# EAGLE board makey_makey-panel (EAGLE 6.2)
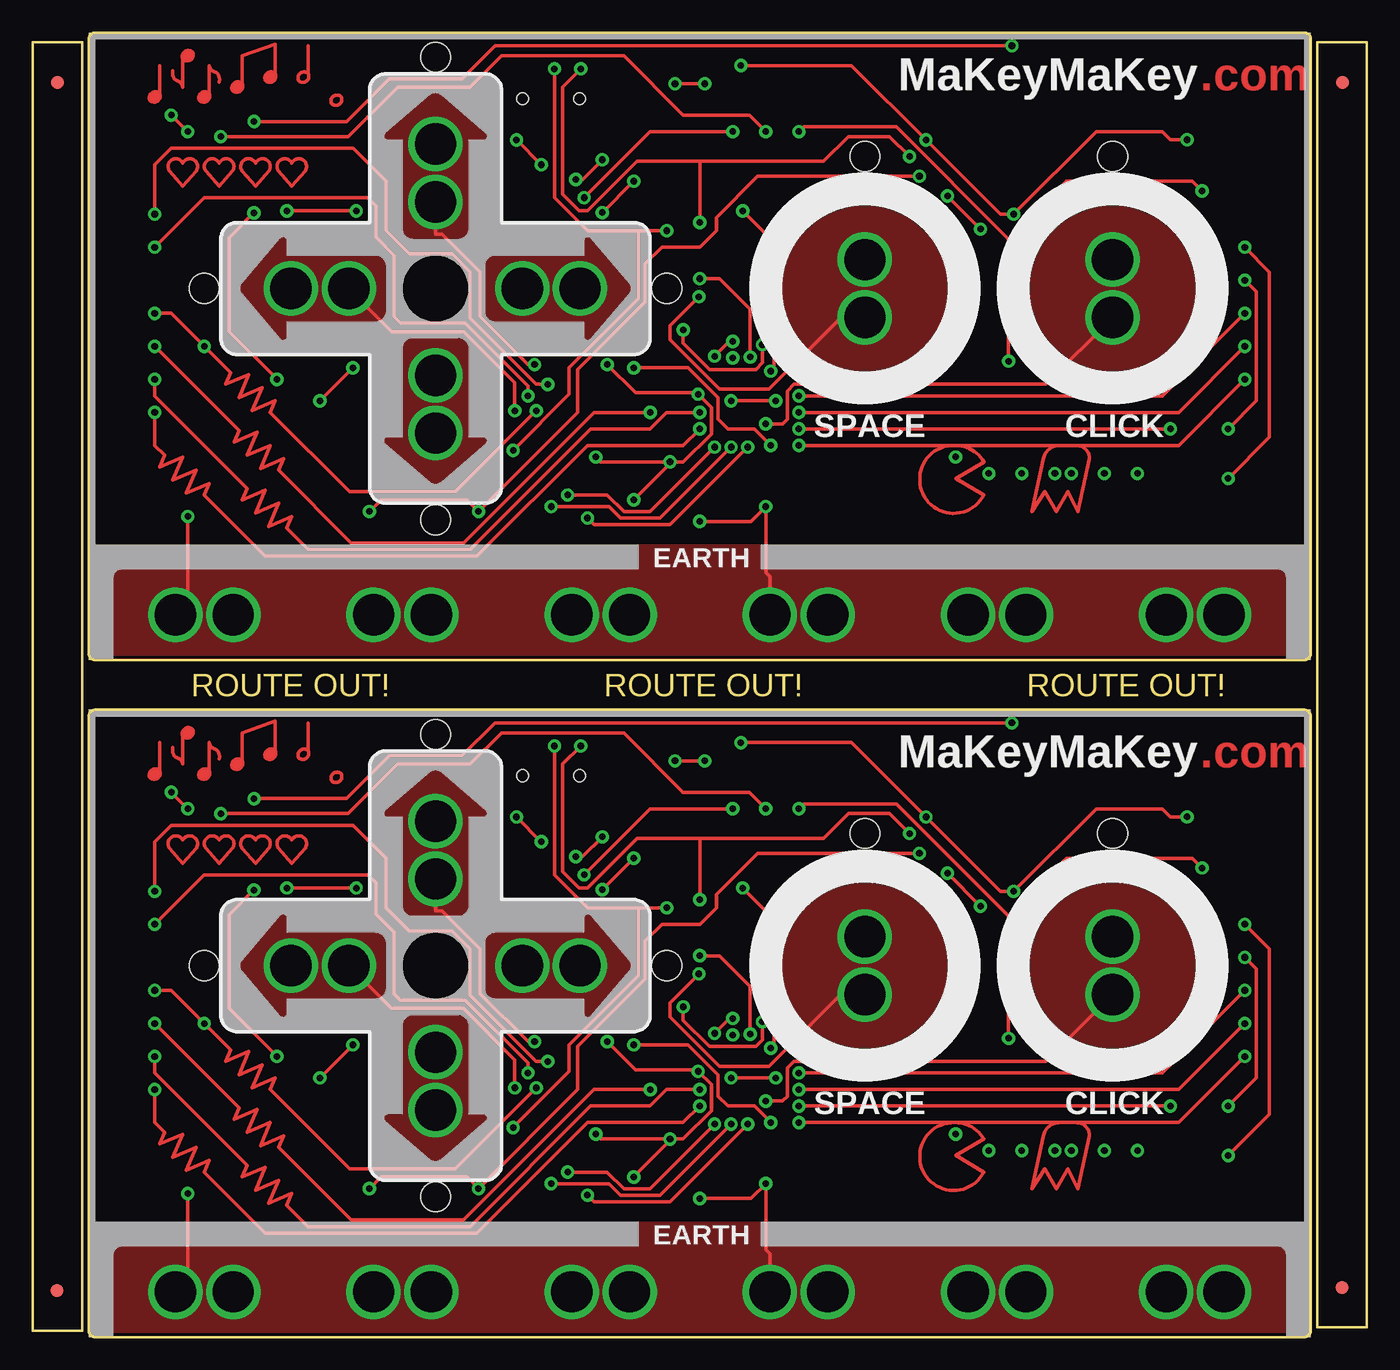
[diagram p0: board, top side]
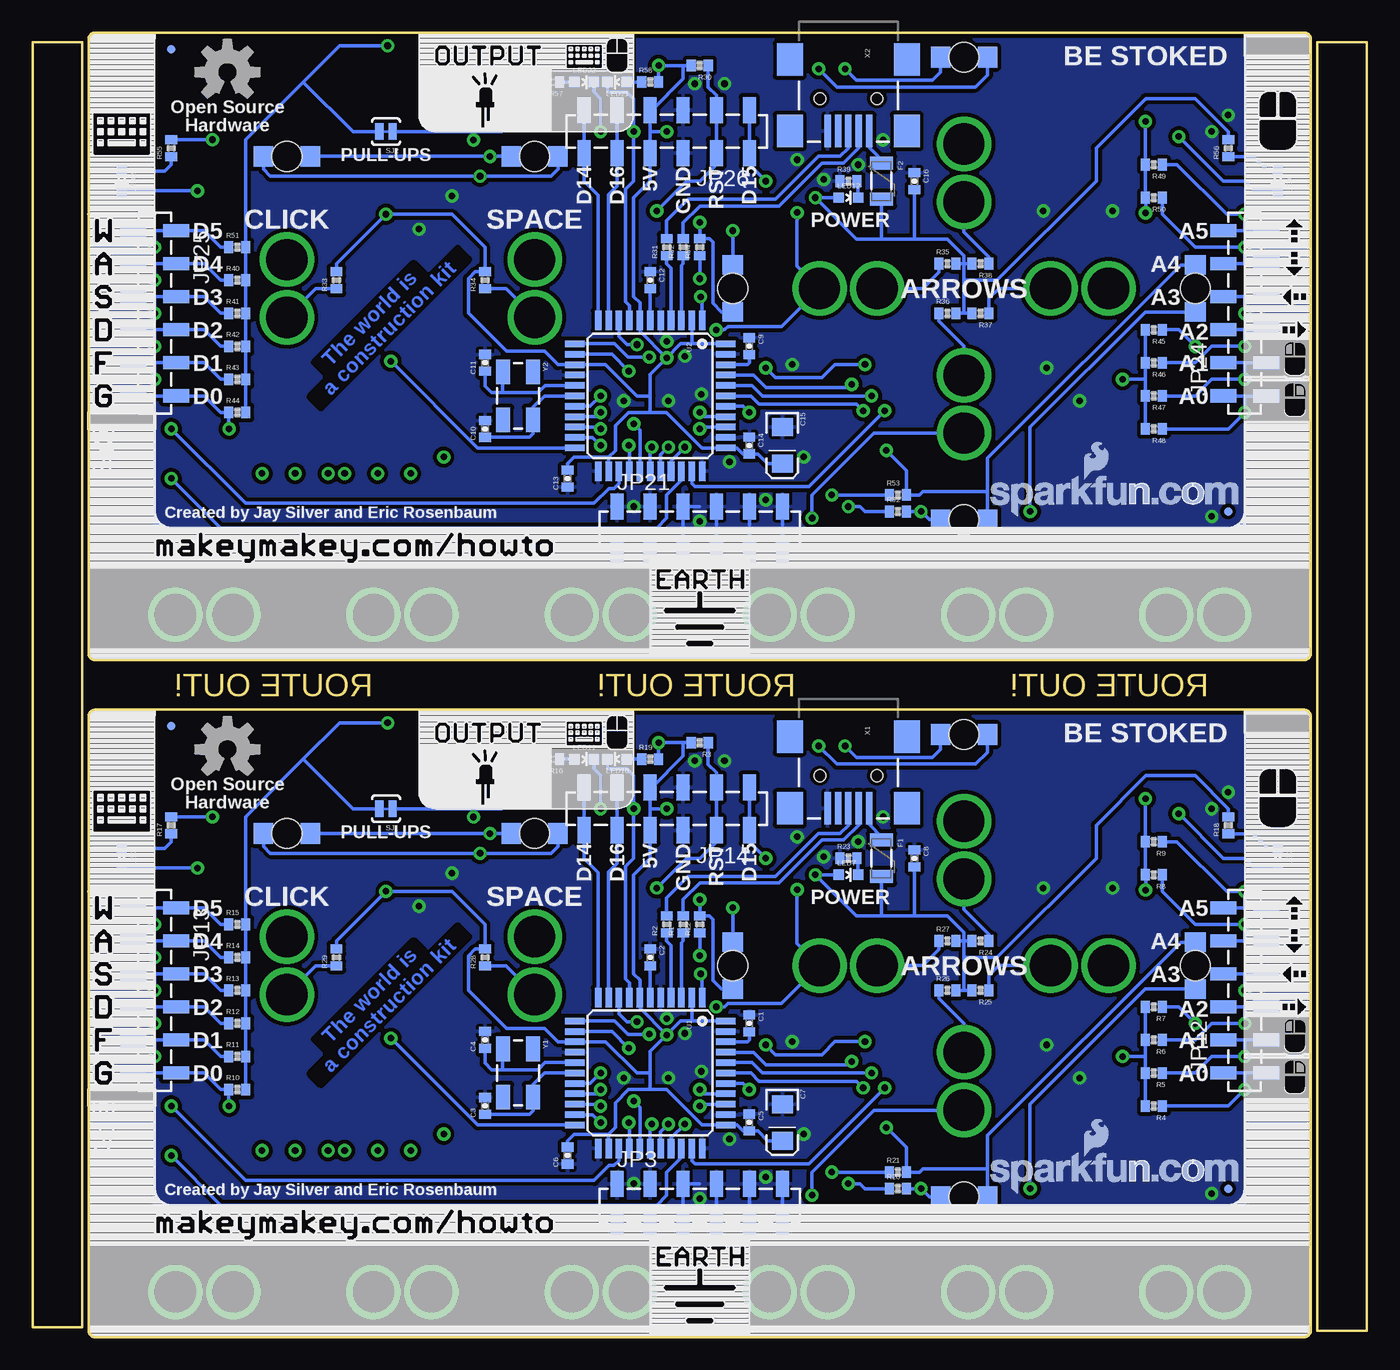
[diagram p1: board, bottom side, seen from below]

Size 102.62 x 100.33 mm. Coordinates in mm from the lower left corner, seen from the top.
Outline: 3.81,3.05 3.81,22.1
Outline: 3.81,22.1 3.81,89.41
Outline: 3.81,22.1 3.81,0.51 0,0.51 0,23.37
Outline: 0,97.03 0,77.98
Outline: 0,77.98 0,10.67
Outline: 0,77.98 0,99.57 3.81,99.57 3.81,76.71
Outline: 98.81,97.03 98.81,77.98
Outline: 98.81,77.98 98.81,10.67
Outline: 98.81,77.98 98.81,99.57 102.62,99.57 102.62,76.71
Outline: 102.62,3.3 102.62,22.35
Outline: 102.62,22.35 102.62,89.66
Outline: 102.62,22.35 102.62,0.76 98.81,0.76 98.81,23.62
Outline: 4.32,0.54 4.32,47.72 arc-90 4.86,48.26 97.76,48.26 arc-90 98.3,47.72 98.3,0.54 arc-90 97.76,0 4.86,0 arc-90 4.32,0.54
Outline: 4.32,52.61 4.32,99.79 arc-90 4.86,100.33 97.76,100.33 arc-90 98.3,99.79 98.3,52.61 arc-90 97.76,52.07 4.86,52.07 arc-90 4.32,52.61
Copper layers (1*16): Top 0.035mm / dielectric 1.5mm / Bottom 0.035mm
Design rules: minimum track width 8mil, minimum drill 20mil, track to track 8mil, track to pad 8mil, pad to pad 8mil, via to via 8mil, smd to smd 8mil, copper to edge 8mil, drill to drill 8mil, minimum pad ring 12mil, minimum via ring 10mil, stop-mask expansion 4mil, vias tented up to drill 20mil, thermal gap 10mil
Net classes: 0 default: width 0.203 mm
bRestrict: area 56.6,45.3 to 61.5,47.6; area 56.6,97.4 to 61.5,99.7

## Footprints (pad centres in the part's own frame; a part is rotated, then mirrored left to right if it is on the bottom)
0402-CAP = smd 0.7 x 0.9: 1 -0.65,0; 2 0.65,0
EIA3216 = smd 1.4 x 1.6: A 1.4,0; C -1.4,0
1X01_ALLIGATOR_3MM = drill 3.175: 1@0 0,2.223; 1@2 0,-2.223
FIDUCIAL-1X2 = smd 1 x 1: 1 0,0
PTC-1206 = smd 1 x 1.8: 1 -1.4,0; 2 1.4,0
MICRO-FIDUCIAL = smd 0.635 x 0.635: 1 0,0
1X06_SMD_STRAIGHT_COMBO = smd 1 x 2: 1 0,-1.65; 1-2 0,1.65; 2 2.54,1.65; 2-2 2.54,-1.65; 3 5.08,-1.65; 3-2 5.08,1.65; 4 7.62,1.65; 4-2 7.62,-1.65; 5 10.16,-1.65; 5-2 10.16,1.65; 6 12.7,1.65; 6-2 12.7,-1.65
LED-1206-BOTTOM = smd 1.5 x 1.6: A -1.8,0; C 1.8,0 | hole 2.3: 0,0
LED-0603 = smd 0.8 x 0.8: A 0,-0.75; C 0,0.75
0402-RES = smd 0.7 x 0.9: 1 -0.65,0; 2 0.65,0
SJ_2S-TRACE = smd 0.635 x 1.27: 1 -0.508,0; 2 0.508,0
TQFP44 = smd 1.5 x 0.5: 1 -5.8,4; 2 -5.8,3.2; 3 -5.8,2.4; 4 -5.8,1.6; 5 -5.8,0.8; 6 -5.8,0; 7 -5.8,-0.8; 8 -5.8,-1.6; 9 -5.8,-2.4; 10 -5.8,-3.2; 11 -5.8,-4; 23 5.8,-4; 24 5.8,-3.2; 25 5.8,-2.4; 26 5.8,-1.6; 27 5.8,-0.8; 28 5.8,0; 29 5.8,0.8; 30 5.8,1.6; 31 5.8,2.4; 32 5.8,3.2; 33 5.8,4 | smd 0.5 x 1.5: 12 -4,-5.8; 13 -3.2,-5.8; 14 -2.4,-5.8; 15 -1.6,-5.8; 16 -0.8,-5.8; 17 0,-5.8; 18 0.8,-5.8; 19 1.6,-5.8; 20 2.4,-5.8; 21 3.2,-5.8; 22 4,-5.8; 34 4,5.8; 35 3.2,5.8; 36 2.4,5.8; 37 1.6,5.8; 38 0.8,5.8; 39 0,5.8; 40 -0.8,5.8; 41 -1.6,5.8; 42 -2.4,5.8; 43 -3.2,5.8; 44 -4,5.8
USB-MINIB = smd 2.5 x 0.5: D+ 2.5,0; D- 2.5,0.8; GND 2.5,-1.6; ID 2.5,-0.8; VBUS 2.5,1.6 | smd 2.5 x 2: MTN1 -3,4.5; MTN2 2.5,4.5; MTN3 -3,-4.5; MTN4 2.5,-4.5 | hole 0.9: 0,2.2; 0,-2.2
CRYSTAL-SMD-5X3 = smd 1.9 x 1.1: 1 -1.85,-1.15; 2 1.85,-1.15; 3 1.85,1.15; 4 -1.85,1.15

## Placement (x,y rotation side)
C1  0.1uF  [0402-CAP]  47.5,24.13 270 bottom
C2  1uF  [0402-CAP]  55.12,29.21 270 bottom
C3  22pF  [0402-CAP]  67.82,17.78 90 bottom
C4  22pF  [0402-CAP]  67.82,22.86 90 bottom
C5  0.1uF  [0402-CAP]  47.5,16.51 270 bottom
C6  1uF  [0402-CAP]  61.47,13.97 90 bottom
C7  10uF  [EIA3216]  44.96,16.51 270 bottom
C8  0.1uF  [0402-CAP]  34.8,36.83 270 bottom
C9  0.1uF  [0402-CAP]  47.5,76.2 270 bottom
C10  22pF  [0402-CAP]  67.82,69.85 90 bottom
C11  22pF  [0402-CAP]  67.82,74.93 90 bottom
C12  1uF  [0402-CAP]  55.12,81.28 270 bottom
C13  1uF  [0402-CAP]  61.47,66.04 90 bottom
C14  0.1uF  [0402-CAP]  47.5,68.58 270 bottom
C15  10uF  [EIA3216]  44.96,68.58 270 bottom
C16  0.1uF  [0402-CAP]  34.8,88.9 270 bottom
CLICK  [1X01_ALLIGATOR_3MM]  83.06,28.57 180 bottom
CLICK1  [1X01_ALLIGATOR_3MM]  83.06,80.64 180 bottom
DOWN  [1X01_ALLIGATOR_3MM]  30.99,19.68 0 top
DOWN1  [1X01_ALLIGATOR_3MM]  30.99,71.75 0 top
E$1  [FIDUCIAL-1X2]  1.93,96.49 0 top
E$2  [FIDUCIAL-1X2]  1.88,3.58 180 top
E$3  [FIDUCIAL-1X2]  100.74,96.49 0 top
E$4  [FIDUCIAL-1X2]  100.69,3.84 180 top
F1  500mA  [PTC-1206]  37.34,36.83 270 bottom
F2  500mA  [PTC-1206]  37.34,88.9 270 bottom
JP1  FIDUCIALUFIDUCIAL  [MICRO-FIDUCIAL]  91.95,46.99 0 bottom
JP2  FIDUCIALUFIDUCIAL  [MICRO-FIDUCIAL]  10.67,11.43 0 bottom
JP3  [1X06_SMD_STRAIGHT_COMBO]  57.66,10.16 0 bottom
JP4  LOGO-SFENEW  [SFE-NEW-WEBLOGO]  28.96,63.12 0 bottom
JP5  [1X01_ALLIGATOR_3MM]  89.41,3.49 90 top
JP6  [1X01_ALLIGATOR_3MM]  74.17,3.49 90 top
JP7  [1X01_ALLIGATOR_3MM]  58.93,3.49 90 top
JP8  [1X01_ALLIGATOR_3MM]  43.69,3.49 90 top
JP9  LOGO-SFENEW  [SFE-NEW-WEBLOGO]  28.96,11.05 0 bottom
JP10  [1X01_ALLIGATOR_3MM]  28.45,3.49 90 top
JP11  [1X01_ALLIGATOR_3MM]  13.21,3.49 90 top
JP12  [1X06_SMD_STRAIGHT_COMBO]  9.4,20.32 90 bottom
JP13  [1X06_SMD_STRAIGHT_COMBO]  93.22,33.02 270 bottom
JP14  [1X06_SMD_STRAIGHT_COMBO]  47.5,40.64 180 bottom
JP15  [1X01_ALLIGATOR_3MM]  13.21,55.56 90 top
JP16  [1X01_ALLIGATOR_3MM]  28.45,55.56 90 top
JP17  [1X01_ALLIGATOR_3MM]  43.69,55.56 90 top
JP18  [1X01_ALLIGATOR_3MM]  58.93,55.56 90 top
JP19  [1X01_ALLIGATOR_3MM]  74.17,55.56 90 top
JP20  [1X01_ALLIGATOR_3MM]  89.41,55.56 90 top
JP21  [1X06_SMD_STRAIGHT_COMBO]  57.66,62.23 0 bottom
JP22  FIDUCIALUFIDUCIAL  [MICRO-FIDUCIAL]  91.95,99.06 0 bottom
JP23  FIDUCIALUFIDUCIAL  [MICRO-FIDUCIAL]  10.67,63.5 0 bottom
JP24  [1X06_SMD_STRAIGHT_COMBO]  9.4,72.39 90 bottom
JP25  [1X06_SMD_STRAIGHT_COMBO]  93.22,85.09 270 bottom
JP26  [1X06_SMD_STRAIGHT_COMBO]  47.5,92.71 180 bottom
LED1  GREEN  [LED-1206-BOTTOM]  30.99,10.79 0 bottom
LED2  GREEN  [LED-1206-BOTTOM]  13.21,28.57 270 bottom
LED3  GREEN  [LED-1206-BOTTOM]  83.06,38.73 0 bottom
LED4  GREEN  [LED-1206-BOTTOM]  64.01,38.73 0 bottom
LED5  GREEN  [LED-1206-BOTTOM]  30.99,46.35 0 bottom
LED6  GREEN  [LED-1206-BOTTOM]  48.77,28.57 90 bottom
LED7  RED  [LED-0603]  39.88,35.56 270 bottom
LED8  GREEN  [LED-0603]  6.86,36.83 180 bottom
LED9  GREEN  [LED-0603]  95.76,36.83 180 bottom
LED10  RED  [LED-0603]  57.66,44.45 90 bottom
LED11  RED  [LED-0603]  60.2,44.45 270 bottom
LED12  RED  [LED-0603]  39.88,87.63 270 bottom
LED13  GREEN  [LED-1206-BOTTOM]  83.06,90.81 0 bottom
LED14  GREEN  [LED-1206-BOTTOM]  64.01,90.81 0 bottom
LED15  GREEN  [LED-1206-BOTTOM]  48.77,80.64 90 bottom
LED16  GREEN  [LED-1206-BOTTOM]  30.99,98.42 0 bottom
LED17  GREEN  [LED-1206-BOTTOM]  13.21,80.64 270 bottom
LED18  GREEN  [LED-1206-BOTTOM]  30.99,62.87 0 bottom
LED19  GREEN  [LED-0603]  6.86,88.9 180 bottom
LED20  GREEN  [LED-0603]  95.76,88.9 180 bottom
LED21  RED  [LED-0603]  57.66,96.52 90 bottom
LED22  RED  [LED-0603]  60.2,96.52 270 bottom
LEFT  [1X01_ALLIGATOR_3MM]  22.1,28.57 270 top
LEFT1  [1X01_ALLIGATOR_3MM]  22.1,80.64 270 top
R1  22  [0402-RES]  52.58,31.75 90 bottom
R2  22  [0402-RES]  53.85,31.75 90 bottom
R3  10K  [0402-RES]  51.31,45.72 180 bottom
R4  22M  [0402-RES]  16.38,17.78 180 bottom
R5  22M  [0402-RES]  16.38,20.32 180 bottom
R6  22M  [0402-RES]  16.38,22.86 180 bottom
R7  22M  [0402-RES]  16.38,25.4 180 bottom
R8  22M  [0402-RES]  16.38,35.56 180 bottom
R9  22M  [0402-RES]  16.38,38.1 180 bottom
R10  22M  [0402-RES]  86.87,19.05 0 bottom
R11  22M  [0402-RES]  86.87,21.59 0 bottom
R12  22M  [0402-RES]  86.87,24.13 0 bottom
R13  22M  [0402-RES]  86.87,26.67 0 bottom
R14  22M  [0402-RES]  86.87,29.21 0 bottom
R15  22M  [0402-RES]  86.87,31.75 0 bottom
R16  1k  [0402-RES]  62.74,44.45 180 bottom
R17  330  [0402-RES]  91.95,39.37 90 bottom
R18  330  [0402-RES]  10.67,39.37 90 bottom
R19  1k  [0402-RES]  55.12,44.45 0 bottom
R20  330  [0402-RES]  36.07,11.43 0 bottom
R21  330  [0402-RES]  36.07,12.7 0 bottom
R22  330  [0402-RES]  51.31,31.75 90 bottom
R23  1k  [0402-RES]  39.88,36.83 0 bottom
R24  22M  [0402-RES]  29.72,30.48 180 bottom
R25  22M  [0402-RES]  29.72,26.67 180 bottom
R26  22M  [0402-RES]  32.26,26.67 0 bottom
R27  22M  [0402-RES]  32.26,30.48 0 bottom
R28  22M  [0402-RES]  67.82,29.21 90 bottom
R29  22M  [0402-RES]  79.25,29.21 90 bottom
R30  10K  [0402-RES]  51.31,97.79 180 bottom
R31  22  [0402-RES]  53.85,83.82 90 bottom
R32  22  [0402-RES]  52.58,83.82 90 bottom
R33  22M  [0402-RES]  79.25,81.28 90 bottom
R34  22M  [0402-RES]  67.82,81.28 90 bottom
R35  22M  [0402-RES]  32.26,82.55 0 bottom
R36  22M  [0402-RES]  32.26,78.74 0 bottom
R37  22M  [0402-RES]  29.72,78.74 180 bottom
R38  22M  [0402-RES]  29.72,82.55 180 bottom
R39  1k  [0402-RES]  39.88,88.9 0 bottom
R40  22M  [0402-RES]  86.87,81.28 0 bottom
R41  22M  [0402-RES]  86.87,78.74 0 bottom
R42  22M  [0402-RES]  86.87,76.2 0 bottom
R43  22M  [0402-RES]  86.87,73.66 0 bottom
R44  22M  [0402-RES]  86.87,71.12 0 bottom
R45  22M  [0402-RES]  16.38,77.47 180 bottom
R46  22M  [0402-RES]  16.38,74.93 180 bottom
R47  22M  [0402-RES]  16.38,72.39 180 bottom
R48  22M  [0402-RES]  16.38,69.85 180 bottom
R49  22M  [0402-RES]  16.38,90.17 180 bottom
R50  22M  [0402-RES]  16.38,87.63 180 bottom
R51  22M  [0402-RES]  86.87,83.82 0 bottom
R52  330  [0402-RES]  36.07,63.5 0 bottom
R53  330  [0402-RES]  36.07,64.77 0 bottom
R54  330  [0402-RES]  51.31,83.82 90 bottom
R55  330  [0402-RES]  91.95,91.44 90 bottom
R56  330  [0402-RES]  10.67,91.44 90 bottom
R57  1k  [0402-RES]  62.74,96.52 180 bottom
R58  1k  [0402-RES]  55.12,96.52 0 bottom
RIGHT  [1X01_ALLIGATOR_3MM]  39.88,28.57 270 top
RIGHT1  [1X01_ALLIGATOR_3MM]  39.88,80.64 270 top
SJ1  Pull-ups  [SJ_2S-TRACE]  75.44,40.64 180 bottom
SJ2  Pull-ups  [SJ_2S-TRACE]  75.44,92.71 180 bottom
SPACE  [1X01_ALLIGATOR_3MM]  64.01,28.57 180 bottom
SPACE1  [1X01_ALLIGATOR_3MM]  64.01,80.64 180 bottom
U1  ATMEGA32U4TQFP  [TQFP44]  55.12,20.32 270 bottom
U2  ATMEGA32U4TQFP  [TQFP44]  55.12,72.39 270 bottom
U$1  OSHW-LOGOM  [OSHW-LOGO-M]  87.63,45.21 0 bottom
U$2  OSHW-LOGOM  [OSHW-LOGO-M]  87.63,97.28 0 bottom
UP  [1X01_ALLIGATOR_3MM]  30.99,37.47 0 top
UP1  [1X01_ALLIGATOR_3MM]  30.99,89.53 0 top
X1  USBSMD  [USB-MINIB]  39.88,43.18 270 bottom
X2  USBSMD  [USB-MINIB]  39.88,95.25 270 bottom
Y1  16MHz  [CRYSTAL-SMD-5X3]  65.28,20.32 270 bottom
Y2  16MHz  [CRYSTAL-SMD-5X3]  65.28,72.39 270 bottom

## Library data of the parts
C1-C16 E$1-E$4 JP1 JP2 JP4 JP9 JP22 JP23 LED7 LED12 R1-R15 R23-R51 SJ1 SJ2 X1 X2 Y1 Y2 = SparkFun
CLICK CLICK1 DOWN DOWN1 JP3 JP5-JP8 JP10-JP21 JP24-JP26 LEFT LEFT1 RIGHT RIGHT1 SPACE SPACE1 UP UP1 = SparkFun-Connectors
F1 F2 = SparkFun-PowerIC
LED1-LED6 LED8-LED11 LED13-LED22 = SparkFun-LED
R16-R22 R52-R58 = SparkFun-Passives
U1 U2 = SparkFun-DigitalIC
U$1 U$2 = SparkFun-Aesthetics

## Nets
A0: JP12.1 JP12.1-2 R4.1 U1.36
A1: JP12.2 JP12.2-2 R5.1 U1.37
A2: JP12.3 JP12.3-2 R6.1 U1.38
A3: JP12.4 JP12.4-2 R7.1 U1.39
A4: JP12.5 JP12.5-2 R8.1 U1.40
A5: JP12.6 JP12.6-2 R9.1 U1.41
A6: JP24.1 JP24.1-2 R48.1 U2.36
A7: JP24.2 JP24.2-2 R47.1 U2.37
A8: JP24.3 JP24.3-2 R46.1 U2.38
A9: JP24.4 JP24.4-2 R45.1 U2.39
A10: JP24.5 JP24.5-2 R50.1 U2.40
A11: JP24.6 JP24.6-2 R49.1 U2.41
AREF: C1.2 U1.42
AREF1: C9.2 U2.42
D0: JP13.6 JP13.6-2 R10.1 U1.20
D1: JP13.5 JP13.5-2 R11.1 U1.21
D2: JP13.4 JP13.4-2 R12.1 U1.19
D3: JP13.3 JP13.3-2 R13.1 U1.18
D4: JP13.2 JP13.2-2 R14.1 U1.25
D5: JP13.1 JP13.1-2 R15.1 U1.31
D6: CLICK.1@0 CLICK.1@2 R29.1 U1.27
D7: R28.1 SPACE.1@0 SPACE.1@2 U1.1
D8: DOWN.1@0 DOWN.1@2 R26.1 U1.28
D9: R20.1 U1.29
D10: R21.1 U1.30
D11: R22.1 U1.12
D12: R24.1 U1.26 UP.1@0 UP.1@2
D13: LEFT.1@0 LEFT.1@2 R25.1 U1.32
D14: JP14.6 JP14.6-2 U1.11
D15: JP14.1 JP14.1-2 R27.1 RIGHT.1@0 RIGHT.1@2 U1.9
D16: JP14.5 JP14.5-2 U1.10
D17: LED8.C LED10.C U1.8
D18: JP26.5 JP26.5-2 U2.10
D19: JP26.6 JP26.6-2 U2.11
D20: JP26.1 JP26.1-2 R35.1 RIGHT1.1@0 RIGHT1.1@2 U2.9
D21: JP25.6 JP25.6-2 R44.1 U2.20
D22: JP25.5 JP25.5-2 R43.1 U2.21
D23: JP25.4 JP25.4-2 R42.1 U2.19
D24: JP25.3 JP25.3-2 R41.1 U2.18
D25: JP25.2 JP25.2-2 R40.1 U2.25
D26: R34.1 SPACE1.1@0 SPACE1.1@2 U2.1
D27: R54.1 U2.12
D28: R38.1 U2.26 UP1.1@0 UP1.1@2
D29: LED19.C LED21.C U2.8
D30: LEFT1.1@0 LEFT1.1@2 R37.1 U2.32
D31: R53.1 U2.30
D32: R52.1 U2.29
D33: DOWN1.1@0 DOWN1.1@2 R36.1 U2.28
D34: CLICK1.1@0 CLICK1.1@2 R33.1 U2.27
D35: JP25.1 JP25.1-2 R51.1 U2.31
D+: R2.1 U1.4
D+1: R31.1 U2.4
D-: R1.1 U1.3
D-1: R32.1 U2.3
GND [vcc]: C1.1 C2.1 C3.2 C4.2 C5.1 C6.1 C7.C C8.1 JP3.1 JP3.1-2 JP3.2 JP3.2-2 JP3.3 JP3.3-2 JP3.4 JP3.4-2 JP3.5 JP3.5-2 JP3.6 JP3.6-2 JP5.1@0 JP5.1@2 JP6.1@0 JP6.1@2 JP7.1@0 JP7.1@2 JP8.1@0 JP8.1@2 JP10.1@0 JP10.1@2 JP11.1@0 JP11.1@2 JP14.3 JP14.3-2 R23.1 U1.5 U1.15 U1.23 U1.33 U1.35 U1.43 X1.GND
GND1 [vcc]: C9.1 C10.2 C11.2 C12.1 C13.1 C14.1 C15.C C16.1 JP15.1@0 JP15.1@2 JP16.1@0 JP16.1@2 JP17.1@0 JP17.1@2 JP18.1@0 JP18.1@2 JP19.1@0 JP19.1@2 JP20.1@0 JP20.1@2 JP21.1 JP21.1-2 JP21.2 JP21.2-2 JP21.3 JP21.3-2 JP21.4 JP21.4-2 JP21.5 JP21.5-2 JP21.6 JP21.6-2 JP26.3 JP26.3-2 R39.1 U2.5 U2.15 U2.23 U2.33 U2.35 U2.43 X2.GND
N$1: C4.1 U1.16 Y1.1
N$2: C3.1 U1.17 Y1.3
N$3: LED8.A R18.1
N$4: C2.2 U1.6
N$5: F1.1 X1.VBUS
N$6: R1.2 X1.D-
N$7: LED7.C R23.2
N$8: R2.2 X1.D+
N$9: LED11.A R16.1
N$10: LED10.A R19.1
N$11: LED9.A R17.1
N$21: C11.1 U2.16 Y2.1
N$22: C10.1 U2.17 Y2.3
N$23: C12.2 U2.6
N$24: LED1.C LED2.A LED5.A LED6.C R21.2
N$25: LED1.A LED2.C LED3.A LED4.C R20.2
N$26: LED3.C LED4.A LED5.C LED6.A R22.2
N$27: R32.2 X2.D-
N$28: R31.2 X2.D+
N$31: LED15.C LED16.A LED17.A LED18.C R53.2
N$36: LED13.A LED14.C LED17.C LED18.A R52.2
N$38: LED13.C LED14.A LED15.A LED16.C R54.2
N$39: F2.1 X2.VBUS
N$40: LED12.C R39.2
N$41: LED22.A R57.1
N$44: LED21.A R58.1
N$58: LED20.A R55.1
N$59: LED19.A R56.1
PD1: LED20.C LED22.C U2.22
PD5: LED9.C LED11.C U1.22
PULL-UP: R4.2 R5.2 R6.2 R7.2 R8.2 R9.2 R10.2 R11.2 R12.2 R13.2 R14.2 R15.2 SJ1.2
PULL-UP1: R40.2 R41.2 R42.2 R43.2 R44.2 R45.2 R46.2 R47.2 R48.2 R49.2 R50.2 R51.2 SJ2.2
RESET: JP14.2 JP14.2-2 R3.1 U1.13
RESET1: JP26.2 JP26.2-2 R30.1 U2.13
VCC: C5.2 C6.2 C7.A C8.2 F1.2 JP14.4 JP14.4-2 LED7.A R3.2 R16.2 R17.2 R18.2 R19.2 R24.2 R25.2 R26.2 R27.2 R28.2 R29.2 SJ1.1 U1.2 U1.7 U1.14 U1.24 U1.34 U1.44
VCC1: C13.2 C14.2 C15.A C16.2 F2.2 JP26.4 JP26.4-2 LED12.A R30.2 R33.2 R34.2 R35.2 R36.2 R37.2 R38.2 R55.2 R56.2 R57.2 R58.2 SJ2.1 U2.2 U2.7 U2.14 U2.24 U2.34 U2.44

## Tracks (layer width: path | path; a pad name or v marks a point on that pad's centre or on a via)
A0  (via drill 0.51)
  Top 0.254: v51.31,17.78 50.04,16.51 42.67,16.51 34.16,8 17.91,8 13.21,12.7 13.59,13.59 11.81,12.83 12.57,14.61 10.79,13.84 11.56,15.62 9.78,14.86 10.16,15.75 9.4,16.51 v9.4,19.05
  Bottom 0.254: JP12.1-2 9.4,20.32 | 9.4,20.32 JP12.1 | U1.36 51.17,17.92 v51.31,17.78 | 9.4,20.32 v9.4,19.05 10.67,17.78 R4.1
A1  (via drill 0.51)
  Top 0.254: v51.31,19.05 48.77,19.05 47.5,17.78 42.93,17.78 33.66,8.51 21.21,8.51 19.56,10.16 19.94,11.05 18.16,10.29 18.92,12.06 17.14,11.3 17.91,13.08 16.13,12.32 16.51,13.21 9.4,20.32 v9.4,21.59
  Bottom 0.254: JP12.2-2 9.4,22.86 | 9.4,22.86 JP12.2 | U1.37 50.98,18.72 v51.31,19.05 | 9.4,22.86 v9.4,21.59 11.94,21.59 13.21,20.32 R5.1
A2  (via drill 0.51)
  Top 0.254: v47.5,19.05 43.18,19.05 33.15,9.02 24.51,9.02 18.92,14.61 19.3,15.49 17.53,14.73 18.29,16.51 16.51,15.75 17.27,17.53 15.49,16.76 15.88,17.65 v9.4,24.13
  Bottom 0.254: JP12.3-2 9.4,25.4 | 9.4,25.4 JP12.3 | U1.38 47.97,19.52 v47.5,19.05 | 9.4,25.4 v9.4,24.13 11.94,24.13 13.21,22.86 R6.1
A3  (via drill 0.51)
  Top 0.254: v38.73,19.18 32.51,12.95 24.38,12.95 18.29,19.05 18.67,19.94 16.89,19.18 17.65,20.95 15.88,20.19 16.64,21.97 14.86,21.21 15.24,22.1 v13.21,24.13 10.67,26.67 v9.4,26.67
  Bottom 0.254: JP12.4 9.4,27.94 | 9.4,27.94 JP12.4-2 | U1.39 47.37,20.32 46.74,19.68 39.24,19.68 v38.73,19.18 | R7.1 14.48,25.4 v13.21,24.13 | v9.4,26.67 9.4,27.94
A4  (via drill 0.51)
  Top 0.254: v9.4,31.75 13.21,35.56 25.78,35.56 26.42,34.92 26.42,32.51 27.81,31.11 27.81,26.42 28.32,25.91 33.27,25.91 38.1,21.08 v38.1,20.32
  Bottom 0.254: JP12.5-2 9.4,30.48 | 9.4,30.48 JP12.5 | 9.4,30.48 v9.4,31.75 13.21,31.75 15.73,34.27 R8.1 | U1.40 47.28,21.12 46.48,20.32 v38.1,20.32
A5  (via drill 0.51)
  Top 0.254: v9.4,34.29 9.4,38.1 10.67,39.37 24.64,39.37 27.18,36.83 27.18,33.02 28.96,31.24 32.26,31.24 33.66,29.84 33.66,26.29 38.73,21.21 v39.62,21.21
  Bottom 0.254: JP12.6 9.4,33.02 | 9.4,33.02 JP12.6-2 | 9.4,33.02 v9.4,34.29 10.79,34.29 14.61,38.1 R9.1 | U1.41 47.19,21.92 46.23,20.95 39.88,20.95 v39.62,21.21
A6  (via drill 0.51)
  Top 0.254: v51.31,69.85 50.04,68.58 42.67,68.58 34.16,60.07 17.91,60.07 13.21,64.77 13.59,65.66 11.81,64.9 12.57,66.67 10.79,65.91 11.56,67.69 9.78,66.93 10.16,67.82 9.4,68.58 v9.4,71.12
  Bottom 0.254: JP24.1-2 9.4,72.39 | 9.4,72.39 JP24.1 | U2.36 51.17,69.99 v51.31,69.85 | 9.4,72.39 v9.4,71.12 10.67,69.85 R48.1
A7  (via drill 0.51)
  Top 0.254: v51.31,71.12 48.77,71.12 47.5,69.85 42.93,69.85 33.66,60.58 21.21,60.58 19.56,62.23 19.94,63.12 18.16,62.36 18.92,64.14 17.14,63.37 17.91,65.15 16.13,64.39 16.51,65.28 9.4,72.39 v9.4,73.66
  Bottom 0.254: JP24.2-2 9.4,74.93 | 9.4,74.93 JP24.2 | U2.37 50.98,70.79 v51.31,71.12 | 9.4,74.93 v9.4,73.66 11.94,73.66 13.21,72.39 R47.1
A8  (via drill 0.51)
  Top 0.254: v47.5,71.12 43.18,71.12 33.15,61.09 24.51,61.09 18.92,66.67 19.3,67.56 17.53,66.8 18.29,68.58 16.51,67.82 17.27,69.6 15.49,68.83 15.88,69.72 v9.4,76.2
  Bottom 0.254: JP24.3-2 9.4,77.47 | 9.4,77.47 JP24.3 | U2.38 47.97,71.59 v47.5,71.12 | 9.4,77.47 v9.4,76.2 11.94,76.2 13.21,74.93 R46.1
A9  (via drill 0.51)
  Top 0.254: v38.73,71.25 32.51,65.02 24.38,65.02 18.29,71.12 18.67,72.01 16.89,71.25 17.65,73.03 15.88,72.26 16.64,74.04 14.86,73.28 15.24,74.17 v13.21,76.2 10.67,78.74 v9.4,78.74
  Bottom 0.254: JP24.4 9.4,80.01 | 9.4,80.01 JP24.4-2 | U2.39 47.37,72.39 46.74,71.75 39.24,71.75 v38.73,71.25 | R45.1 14.48,77.47 v13.21,76.2 | v9.4,78.74 9.4,80.01
A10  (via drill 0.51)
  Top 0.254: v9.4,83.82 13.21,87.63 25.78,87.63 26.42,87 26.42,84.58 27.81,83.19 27.81,78.49 28.32,77.98 33.27,77.98 38.1,73.15 v38.1,72.39
  Bottom 0.254: JP24.5-2 9.4,82.55 | 9.4,82.55 JP24.5 | 9.4,82.55 v9.4,83.82 13.21,83.82 15.73,86.34 R50.1 | U2.40 47.28,73.19 46.48,72.39 v38.1,72.39
A11  (via drill 0.51)
  Top 0.254: v9.4,86.36 9.4,90.17 10.67,91.44 24.64,91.44 27.18,88.9 27.18,85.09 28.96,83.31 32.26,83.31 33.66,81.92 33.66,78.36 38.73,73.28 v39.62,73.28
  Bottom 0.254: JP24.6 9.4,85.09 | 9.4,85.09 JP24.6-2 | 9.4,85.09 v9.4,86.36 10.79,86.36 14.61,90.17 R49.1 | U2.41 47.19,73.99 46.23,73.03 39.88,73.03 v39.62,73.28
AREF
  Bottom 0.254: C1.2 47.5,22.86 47.64,22.72 U1.42
AREF1
  Bottom 0.254: C9.2 47.5,74.93 47.64,74.79 U2.42
D0  (via drill 0.51)
  Top 0.254: v58.93,17.78 v87.5,17.78
  Bottom 0.254: U1.20 59.07,17.92 v58.93,17.78 | JP13.6-2 JP13.6 89.41,20.32 88.14,19.05 R10.1 87.52,17.8 v87.5,17.78
D1  (via drill 0.51)
  Top 0.254: 80.26,16.51 88.14,16.51 v93.22,21.59 | 78.99,16.51 arc77 77.72,15.49 76.83,11.43 77.85,12.95 78.74,11.43 79.63,12.95 80.39,11.43 81.28,15.49 arc90 80.26,16.51 | v58.93,16.51 70.87,16.51 | 70.87,16.51 70.99,16.51 | 70.99,16.51 80.26,16.51 | 70.87,16.51 arc243 73.15,12.7 70.99,13.97 73.15,15.24 arc60 70.99,16.51
  Bottom 0.254: U1.21 59.54,17.12 v58.93,16.51 | JP13.5 93.22,22.86 | 93.22,22.86 JP13.5-2 89.41,22.86 88.14,21.59 R11.1 | v93.22,21.59 93.22,22.86
D2  (via drill 0.51)
  Top 0.254: v58.93,19.05 88.14,19.05 v93.22,24.13
  Bottom 0.254: U1.19 59.26,18.72 v58.93,19.05 | v93.22,24.13 93.22,25.4 | 93.22,25.4 JP13.4-2 | 93.22,25.4 JP13.4 89.41,25.4 88.14,24.13 R12.1
D3  (via drill 0.51)
  Top 0.254: v93.22,26.67 86.87,20.32 v58.93,20.32
  Bottom 0.254: U1.18 59.73,19.52 v58.93,20.32 | 93.22,27.94 JP13.3-2 89.41,27.94 88.14,26.67 R13.1 | 93.22,27.94 JP13.3 | v93.22,26.67 93.22,27.94
D4  (via drill 0.51)
  Top 0.254: v91.95,17.78 94.11,19.94 94.11,28.32 v93.22,29.21
  Bottom 0.254: 93.22,30.48 JP13.2 89.41,30.48 88.14,29.21 R14.1 | 93.22,30.48 JP13.2-2 | v91.95,17.78 86.23,12.06 59.44,12.06 58.29,13.21 57.89,13.21 57.52,13.58 U1.25 | v93.22,29.21 93.22,30.48
D5  (via drill 0.51)
  Top 0.254: v91.95,13.97 95.12,17.14 95.12,29.84 v93.22,31.75
  Bottom 0.254: v91.95,13.97 88.14,10.16 54.61,10.16 53.85,10.92 53.85,12.7 52.72,13.83 U1.31 | 93.22,33.02 JP13.1-2 89.41,33.02 88.14,31.75 R15.1 | 93.22,33.02 JP13.1 | v93.22,31.75 93.22,33.02
D6  (via drill 0.51)
  Top 0.254: v56.39,18.16 57.66,18.16 58.04,18.54 58.04,20.7 58.55,21.21 77.91,21.21 CLICK.1@0
  Bottom 0.254: U1.27 55.92,17.69 v56.39,18.16 | R29.1 80.85,28.56 CLICK.1@0
  pour Top (no thermals): 76.71,28.57 arc-90 83.06,34.92 arc-90 89.41,28.57 arc-90 83.06,22.23 arc-90
D7  (via drill 0.51)
  Top 0.254: v51.24,27.94 49.02,25.72 49.02,24.64 52.83,20.83 56.64,20.83 62.17,26.35 SPACE.1@0
  Bottom 0.254: U1.1 51.12,27.81 v51.24,27.94 | R28.1 66.22,28.56 SPACE.1@0
  pour Top (no thermals): 57.66,28.57 arc-90 64.01,34.92 arc-90 70.36,28.57 arc-90 64.01,22.23 arc-90
D8  (via drill 0.51)
  Top 0.254: v54.99,16.38 49.02,10.41 43.18,10.41 v42.67,10.92
  Bottom 0.254: U1.28 55.12,16.26 v54.99,16.38 | v42.67,10.92 42.67,12.7 37.91,17.46 DOWN.1@2 | DOWN.1@0 30.99,24.13 32.91,26.05 R26.1
  pour Top (no thermals): 33.53,17.14 33.53,23.95 arc90 32.71,24.77 29.26,24.77 arc90 28.45,23.95 28.45,17.14 27.31,17.14 arc139 27.13,16.65 30.57,13.69 arc81 31.4,13.69 34.85,16.65 arc139 34.67,17.14
D9  (via drill 0.51)
  Top 0.254: v53.72,16.38 48.26,10.92 45.21,10.92 44.32,11.81 v39.88,11.81
  Bottom 0.254: U1.29 54.32,15.79 v53.72,16.38 | R20.1 38.61,11.43 38.99,11.81 v39.88,11.81
D10  (via drill 0.51)
  Top 0.254: v52.45,16.38 47.5,11.43 45.47,11.43 44.2,12.7 v41.15,12.7
  Bottom 0.254: U1.30 53.52,15.32 v52.45,16.38 | v41.15,12.7 R21.1
D11  (via drill 0.51)
  Top 0.254: v55.18,23.3 55.18,26.99 52.83,29.34 v51.31,29.34
  Bottom 0.254: U1.12 57.85,24.32 56.83,23.3 v55.18,23.3 | v51.31,29.34 R22.1
D12  (via drill 0.51)
  Top 0.254: v56.77,16.51 55.5,17.78 53.47,17.78 52.7,18.54 52.7,20.19 50.42,22.48 v46.23,22.48 | v38.61,22.73 38.1,22.73 34.42,26.42 34.42,29.84 31.5,32.77 30.99,32.77 UP.1@2
  Bottom 0.254: U1.26 56.72,16.46 v56.77,16.51 | v46.23,22.48 45.47,21.72 41.91,21.72 40.89,22.73 v38.61,22.73 | R24.1 29.07,30.97 30.99,32.89 UP.1@2
  pour Top (no thermals): 28.45,40.01 28.45,33.2 arc90 29.26,32.38 32.71,32.38 arc90 33.53,33.2 33.53,40.01 34.67,40.01 arc139 34.85,40.5 31.4,43.46 arc81 30.57,43.46 27.13,40.5 arc139 27.31,40.01
D13  (via drill 0.51)
  Top 0.254: v37.08,19.18 37.08,21.34 33.15,25.27 27.62,25.27 LEFT.1@0
  Bottom 0.254: U1.32 51.92,13.56 51.69,13.34 42.93,13.34 v37.08,19.18 | LEFT.1@0 28.32,28.57 29.07,27.83 R25.1
  pour Top (no thermals): 19.56,26.04 26.36,26.04 arc90 27.18,26.85 27.18,30.3 arc90 26.36,31.11 19.56,31.11 19.56,32.25 arc139 19.06,32.44 16.1,28.99 arc81 16.1,28.16 19.06,24.71 arc139 19.56,24.9
D14
  Bottom 0.254: JP14.6 JP14.6-2 | JP14.6 60.2,41.91 | U1.11 59.12,35.75 60.2,36.83 JP14.6
D15  (via drill 0.51)
  Top 0.254: v56.13,24.26 56.13,22.86 55.63,22.35 52.07,22.35 50.04,24.38 v50.04,25.4 | v46.23,36.83 v43.81,34.42
  Bottom 0.254: U1.9 57.52,24.88 56.9,24.26 v56.13,24.26 | v50.04,25.4 49.4,25.4 49.15,25.65 45.02,25.65 RIGHT.1@0 43.81,30.29 v43.81,34.42 | JP14.1 JP14.1-2 47.5,38.1 v46.23,36.83 | RIGHT.1@2 34.16,28.57 32.91,29.83 R27.1
  pour Top (no thermals): 42.42,31.11 35.61,31.11 arc90 34.8,30.3 34.8,26.85 arc90 35.61,26.04 42.42,26.04 42.42,24.9 arc139 42.92,24.71 45.87,28.16 arc81 45.87,28.99 42.92,32.44 arc139 42.42,32.25
D16
  Bottom 0.203: JP14.5 57.53,42.29
  Bottom 0.254: JP14.5 JP14.5-2 57.66,36.45 58.32,35.79 U1.10
D17  (via drill 0.51)
  Top 0.254: v14.48,40.26 24.26,40.26 28.07,44.07 33.66,44.07 36.07,46.48 45.47,46.48 50.04,41.91 55.12,41.91 v56.39,40.64
  Bottom 0.254: U1.8 56.72,27.25 57.02,27.56 57.02,36.2 56.39,36.83 v56.39,40.64 56.39,43.18 56.9,43.69 58.29,43.69 58.41,43.8 LED10.C | LED8.C 8.65,36.08 9.4,36.83 11.05,36.83 v14.48,40.26
D18
  Bottom 0.203: JP26.5 57.53,94.36
  Bottom 0.254: JP26.5 JP26.5-2 57.66,88.52 58.32,87.86 U2.10
D19
  Bottom 0.254: JP26.6 JP26.6-2 | JP26.6 60.2,93.98 | U2.11 59.12,87.82 60.2,88.9 JP26.6
D20  (via drill 0.51)
  Top 0.254: v56.13,76.33 56.13,74.93 55.63,74.42 52.07,74.42 50.04,76.45 v50.04,77.47 | v46.23,88.9 v43.81,86.49
  Bottom 0.254: U2.9 57.52,76.95 56.9,76.33 v56.13,76.33 | v50.04,77.47 49.4,77.47 49.15,77.72 45.02,77.72 RIGHT1.1@0 43.81,82.36 v43.81,86.49 | JP26.1 JP26.1-2 47.5,90.17 v46.23,88.9 | RIGHT1.1@2 34.16,80.64 32.91,81.9 R35.1
  pour Top (no thermals): 42.42,83.19 35.61,83.19 arc90 34.8,82.37 34.8,78.92 arc90 35.61,78.11 42.42,78.11 42.42,76.97 arc139 42.92,76.78 45.87,80.23 arc81 45.87,81.06 42.92,84.51 arc139 42.42,84.32
D21  (via drill 0.51)
  Top 0.254: v58.93,69.85 v87.5,69.85
  Bottom 0.254: U2.20 59.07,69.99 v58.93,69.85 | JP25.6-2 JP25.6 89.41,72.39 88.14,71.12 R44.1 87.52,69.86 v87.5,69.85
D22  (via drill 0.51)
  Top 0.254: 80.26,68.58 88.14,68.58 v93.22,73.66 | 78.99,68.58 arc77 77.72,67.56 76.83,63.5 77.85,65.02 78.74,63.5 79.63,65.02 80.39,63.5 81.28,67.56 arc90 80.26,68.58 | v58.93,68.58 70.87,68.58 | 70.87,68.58 70.99,68.58 | 70.99,68.58 80.26,68.58 | 70.87,68.58 arc243 73.15,64.77 70.99,66.04 73.15,67.31 arc60 70.99,68.58
  Bottom 0.254: U2.21 59.54,69.19 v58.93,68.58 | JP25.5 93.22,74.93 | 93.22,74.93 JP25.5-2 89.41,74.93 88.14,73.66 R43.1 | v93.22,73.66 93.22,74.93
D23  (via drill 0.51)
  Top 0.254: v58.93,71.12 88.14,71.12 v93.22,76.2
  Bottom 0.254: U2.19 59.26,70.79 v58.93,71.12 | v93.22,76.2 93.22,77.47 | 93.22,77.47 JP25.4-2 | 93.22,77.47 JP25.4 89.41,77.47 88.14,76.2 R42.1
D24  (via drill 0.51)
  Top 0.254: v93.22,78.74 86.87,72.39 v58.93,72.39
  Bottom 0.254: U2.18 59.73,71.59 v58.93,72.39 | 93.22,80.01 JP25.3-2 89.41,80.01 88.14,78.74 R41.1 | 93.22,80.01 JP25.3 | v93.22,78.74 93.22,80.01
D25  (via drill 0.51)
  Top 0.254: v91.95,69.85 94.11,72.01 94.11,80.39 v93.22,81.28
  Bottom 0.254: 93.22,82.55 JP25.2 89.41,82.55 88.14,81.28 R40.1 | 93.22,82.55 JP25.2-2 | v91.95,69.85 86.23,64.14 59.44,64.14 58.29,65.28 57.89,65.28 57.52,65.65 U2.25 | v93.22,81.28 93.22,82.55
D26  (via drill 0.51)
  Top 0.254: v51.24,80.01 49.02,77.79 49.02,76.71 52.83,72.9 56.64,72.9 62.17,78.42 SPACE1.1@0
  Bottom 0.254: U2.1 51.12,79.88 v51.24,80.01 | R34.1 66.22,80.63 SPACE1.1@0
  pour Top (no thermals): 57.66,80.64 arc-90 64.01,87 arc-90 70.36,80.64 arc-90 64.01,74.3 arc-90
D27  (via drill 0.51)
  Top 0.254: v55.18,75.37 55.18,79.06 52.83,81.41 v51.31,81.41
  Bottom 0.254: U2.12 57.85,76.39 56.83,75.37 v55.18,75.37 | v51.31,81.41 R54.1
D28  (via drill 0.51)
  Top 0.254: v56.77,68.58 55.5,69.85 53.47,69.85 52.7,70.61 52.7,72.26 50.42,74.55 v46.23,74.55 | v38.61,74.8 38.1,74.8 34.42,78.49 34.42,81.92 31.5,84.84 30.99,84.84 UP1.1@2
  Bottom 0.254: U2.26 56.72,68.53 v56.77,68.58 | v46.23,74.55 45.47,73.79 41.91,73.79 40.89,74.8 v38.61,74.8 | R38.1 29.07,83.04 30.99,84.96 UP1.1@2
  pour Top (no thermals): 28.45,92.08 28.45,85.27 arc90 29.26,84.45 32.71,84.45 arc90 33.53,85.27 33.53,92.08 34.67,92.08 arc139 34.85,92.57 31.4,95.53 arc81 30.57,95.53 27.13,92.57 arc139 27.31,92.08
D29  (via drill 0.51)
  Top 0.254: v14.48,92.33 24.26,92.33 28.07,96.14 33.66,96.14 36.07,98.55 45.47,98.55 50.04,93.98 55.12,93.98 v56.39,92.71
  Bottom 0.254: U2.8 56.72,79.32 57.02,79.63 57.02,88.27 56.39,88.9 v56.39,92.71 56.39,95.25 56.9,95.76 58.29,95.76 58.41,95.87 LED21.C | LED19.C 8.65,88.15 9.4,88.9 11.05,88.9 v14.48,92.33
D30  (via drill 0.51)
  Top 0.254: v37.08,71.25 37.08,73.41 33.15,77.34 27.62,77.34 LEFT1.1@0
  Bottom 0.254: U2.32 51.92,65.63 51.69,65.41 42.93,65.41 v37.08,71.25 | LEFT1.1@0 28.32,80.64 29.07,79.9 R37.1
  pour Top (no thermals): 19.56,78.11 26.36,78.11 arc90 27.18,78.92 27.18,82.37 arc90 26.36,83.19 19.56,83.19 19.56,84.32 arc139 19.06,84.51 16.1,81.06 arc81 16.1,80.23 19.06,76.78 arc139 19.56,76.97
D31  (via drill 0.51)
  Top 0.254: v52.45,68.45 47.5,63.5 45.47,63.5 44.2,64.77 v41.15,64.77
  Bottom 0.254: U2.30 53.52,67.39 v52.45,68.45 | v41.15,64.77 R53.1
D32  (via drill 0.51)
  Top 0.254: v53.72,68.45 48.26,62.99 45.21,62.99 44.32,63.88 v39.88,63.88
  Bottom 0.254: U2.29 54.32,67.86 v53.72,68.45 | R52.1 38.61,63.5 38.99,63.88 v39.88,63.88
D33  (via drill 0.51)
  Top 0.254: v54.99,68.45 49.02,62.48 43.18,62.48 v42.67,62.99
  Bottom 0.254: U2.28 55.12,68.33 v54.99,68.45 | v42.67,62.99 42.67,64.77 37.91,69.53 DOWN1.1@2 | DOWN1.1@0 30.99,76.2 32.91,78.12 R36.1
  pour Top (no thermals): 33.53,69.22 33.53,76.02 arc90 32.71,76.83 29.26,76.83 arc90 28.45,76.02 28.45,69.22 27.31,69.22 arc139 27.13,68.72 30.57,65.76 arc81 31.4,65.76 34.85,68.72 arc139 34.67,69.22
D34  (via drill 0.51)
  Top 0.254: v56.39,70.23 57.66,70.23 58.04,70.61 58.04,72.77 58.55,73.28 77.91,73.28 CLICK1.1@0
  Bottom 0.254: U2.27 55.92,69.76 v56.39,70.23 | R33.1 80.85,80.63 CLICK1.1@0
  pour Top (no thermals): 76.71,80.64 arc-90 83.06,87 arc-90 89.41,80.64 arc-90 83.06,74.3 arc-90
D35  (via drill 0.51)
  Top 0.254: v91.95,66.04 95.12,69.22 95.12,81.92 v93.22,83.82
  Bottom 0.254: v91.95,66.04 88.14,62.23 54.61,62.23 53.85,62.99 53.85,64.77 52.72,65.9 U2.31 | 93.22,85.09 JP25.1-2 89.41,85.09 88.14,83.82 R51.1 | 93.22,85.09 JP25.1 | v93.22,83.82 93.22,85.09
D+
  Bottom 0.254: U1.4 53.52,30.15 53.85,30.48 R2.1
D+1
  Bottom 0.254: U2.4 53.52,82.22 53.85,82.55 R31.1
D-
  Bottom 0.254: U1.3 52.72,30.34 52.58,30.48 R1.1
D-1
  Bottom 0.254: U2.3 52.72,82.41 52.58,82.55 R32.1
GND  (via drill 0.51)
  Top 0.254: v49.02,15.24 50.04,15.24 52.2,17.4 52.2,19.43 v51.18,20.45 51.05,20.57 46.35,20.57 v44.2,22.73 | v53.85,24.51 53.59,24.51 v52.45,23.37 | v41.78,36.96 42.29,36.96 v43.81,38.48 | v46.23,12.32 49.15,15.24 v49.02,15.24 | JP7.1@0 56.71,6.41 56.39,6.73 v56.39,11.81 55.24,10.67 v51.31,10.67 | v49.02,15.24 43.69,15.24 v43.31,15.62 | v39.12,38.1 v37.21,40.01 | v57.15,19.94 v53.72,19.94 | v49.4,44.32 v51.69,44.32 | v11.94,40.64 v10.67,41.91 | v70.36,35.69 v72.9,33.15 | v24.64,22.48 v22.1,19.94 | v24.89,34.54 v19.56,34.54 | JP11.1@0 11.94,3.49 v11.94,11.05
  Bottom 0.254: JP3.3-2 51.31,11.81 | JP3.2-2 57.28,8.51 57.66,8.89 | JP3.1 JP3.2-2 | 45.34,8.51 44.96,8.89 | 44.96,8.89 44.96,11.43 | JP3.5 47.5,11.43 | JP3.4-2 50.04,11.43 | JP3.3 52.58,11.43 | JP3.2-2 JP3.6-2 44.96,8.89
  pour Top (no thermals): 6.22,0 6.22,6.35 arc-90 6.86,6.99 46.61,6.99 46.61,8.89 56.01,8.89 56.01,6.99 95.76,6.99 arc-90 96.39,6.35 96.39,0
  pour Bottom (isolate 0.305): 9.4,48.26 9.4,10.16 93.22,10.16 93.22,48.26
GND1  (via drill 0.51)
  Top 0.254: v49.02,67.31 50.04,67.31 52.2,69.47 52.2,71.5 v51.18,72.52 51.05,72.64 46.35,72.64 v44.2,74.8 | v53.85,76.58 53.59,76.58 v52.45,75.44 | v41.78,89.03 42.29,89.03 v43.81,90.55 | v46.23,64.39 49.15,67.31 v49.02,67.31 | JP18.1@0 56.71,58.48 56.39,58.8 v56.39,63.88 55.24,62.74 v51.31,62.74 | v49.02,67.31 43.69,67.31 v43.31,67.69 | v39.12,90.17 v37.21,92.08 | v57.15,72.01 v53.72,72.01 | v49.4,96.39 v51.69,96.39 | v11.94,92.71 v10.67,93.98 | v70.36,87.76 v72.9,85.22 | v24.64,74.55 v22.1,72.01 | v24.89,86.61 v19.56,86.61 | JP15.1@0 11.94,55.56 v11.94,63.12
  Bottom 0.254: JP21.3-2 51.31,63.88 | JP21.2-2 57.28,60.58 57.66,60.96 | JP21.1 JP21.2-2 | 45.34,60.58 44.96,60.96 | 44.96,60.96 44.96,63.5 | JP21.5 47.5,63.5 | JP21.4-2 50.04,63.5 | JP21.3 52.58,63.5 | JP21.2-2 JP21.6-2 44.96,60.96
  pour Top (no thermals): 6.22,52.07 6.22,58.42 arc-90 6.86,59.05 46.61,59.05 46.61,60.96 56.01,60.96 56.01,59.05 95.76,59.05 arc-90 96.39,58.42 96.39,52.07
  pour Bottom (isolate 0.305): 9.4,100.33 9.4,62.23 93.22,62.23 93.22,100.33
N$1
  Bottom 0.254: U1.16 63.21,21.12 63.75,20.57 66.42,20.57 | 66.42,20.57 67.31,20.57 67.82,21.08 C4.1 | Y1.1 66.47,22.21 66.47,20.62 66.42,20.57
N$2
  Bottom 0.254: U1.17 63.25,20.32 64.13,19.44 Y1.3 64.13,17.41 64.4,17.13 C3.1
N$3
  Bottom 0.254: LED8.A 7.61,37.58 8.75,38.72 R18.1
N$4
  Bottom 0.254: U1.6 C2.2
N$5
  Bottom 0.254: X1.VBUS 38.28,39.42 37.34,38.48 F1.1
N$6
  Bottom 0.254: X1.D- 39.08,39.41 40.26,38.23 41.91,38.23 45.21,34.92 51.31,34.92 52.58,33.66 R1.2
N$7
  Bottom 0.254: LED7.C 39.13,36.73 R23.2
N$8
  Bottom 0.254: R2.2 53.85,33.78 52.2,35.43 45.47,35.43 42.16,38.73 40.51,38.73 39.88,39.37 X1.D+
N$9
  Bottom 0.254: LED11.A R16.1
  pour Top: 49.56,7.99 49.56,8.05 49.87,8.37 50.19,8.05 50.19,7.99
N$10
  Bottom 0.254: LED10.A R19.1
  pour Top: 50.96,7.91 50.96,8.41 51.45,8.41 51.6,8.26 51.6,7.92 51.45,7.77 50.96,7.77 50.96,7.91 50.96,7.91
N$11
  Bottom 0.254: LED9.A 92.47,37.58 91.95,38.1 R17.1
N$12  (via drill 0.51)
  other vias: 70.99,15.62
N$13  (via drill 0.51)
  other vias: 73.53,14.35
N$14  (via drill 0.51)
  other vias: 78.61,14.35
N$15  (via drill 0.51)
  other vias: 76.07,14.35
N$16  (via drill 0.51)
  other vias: 79.88,14.35
N$17  (via drill 0.51)
  other vias: 82.42,14.35
N$18  (via drill 0.51)
  other vias: 84.96,14.35
N$19
  Top 0.254: 23.75,43.31 arc-160 22.99,42.8 arc-160 23.75,43.31
N$20
  Top 0.254: 21.21,47.24 21.21,45.09 | 21.21,45.09 arc-160 20.45,44.58 arc-160 21.21,45.09
N$21
  Bottom 0.254: U2.16 63.21,73.19 63.75,72.64 66.42,72.64 | 66.42,72.64 67.31,72.64 67.82,73.15 C11.1 | Y2.1 66.47,74.28 66.47,72.69 66.42,72.64
N$22
  Bottom 0.254: U2.17 63.25,72.39 64.13,71.51 Y2.3 64.13,69.48 64.4,69.2 C10.1
N$23
  Bottom 0.254: U2.6 C12.2
N$24  (via drill 0.51)
  Top 0.254: v36.96,16.13 41.27,20.45 41.27,22.48 46.61,27.81 46.61,33.02 | v48.77,33.02 46.61,33.02 | v40.13,45.47 40.13,35.56 42.67,33.02 46.61,33.02
  Bottom 0.254: 29.19,12.95 34.16,12.95 34.42,12.7 R21.2 35.42,14.59 v36.96,16.13 | LED2.A 14.33,30.38 29.19,15.52 29.19,12.95 | v48.77,33.02 LED6.C | v40.13,45.47 39.24,44.58 33.4,44.58 32.79,45.19 LED5.A | LED1.C 29.19,12.95
N$25  (via drill 0.51)
  Top 0.254: v25.91,11.43 26.8,12.32 33.4,12.32 v34.29,11.43 41.91,19.05 41.91,22.35 47.12,27.56 47.12,30.48 48.39,31.75 51.31,31.75 52.58,33.02 52.58,34.04 55.75,37.21 v68.2,37.21
  Bottom 0.254: LED2.C 17.04,26.77 25.91,17.91 v25.91,11.43 | R20.2 v34.29,11.43 33.66,10.79 LED1.A | LED3.A 84.86,37.74 84.33,37.21 v68.2,37.21 62.74,37.21 62.21,37.74 LED4.C
N$26  (via drill 0.51)
  Top 0.254: 51.31,38.35 46.48,38.35 42.67,34.54 42.04,34.54 40.77,35.81 40.77,44.07 v42.16,45.47 | 51.31,38.35 60.83,38.35 62.74,40.26 65.91,40.26 v67.44,38.73 | v51.31,33.66 51.31,38.35
  Bottom 0.254: v51.31,33.66 R22.2 50.56,32.4 50.29,32.13 50.29,27.43 49.63,26.77 LED6.A | v42.16,45.47 40.77,44.07 30.1,44.07 29.19,44.98 LED5.C | LED4.A v67.44,38.73 LED3.C
N$27
  Bottom 0.254: X2.D- 39.08,91.48 40.26,90.3 41.91,90.3 45.21,87 51.31,87 52.58,85.72 R32.2
N$28
  Bottom 0.254: R31.2 53.85,85.85 52.2,87.5 45.47,87.5 42.16,90.81 40.51,90.81 39.88,91.44 X2.D+
N$29
  pour Top: 49.56,7.99 49.56,8.05 49.87,8.37 50.19,8.05 50.19,7.99
N$30
  pour Top: 50.96,7.91 50.96,8.41 51.45,8.41 51.6,8.26 51.6,7.92 51.45,7.77 50.96,7.77 50.96,7.91 50.96,7.91
N$31  (via drill 0.51)
  Top 0.254: v36.96,68.2 41.27,72.52 41.27,74.55 46.61,79.88 46.61,85.09 | v48.77,85.09 46.61,85.09 | v40.13,97.54 40.13,87.63 42.67,85.09 46.61,85.09
  Bottom 0.254: 29.19,65.02 34.16,65.02 34.42,64.77 R53.2 35.42,66.66 v36.96,68.2 | LED17.A 14.33,82.44 29.19,67.59 29.19,65.02 | v48.77,85.09 LED15.C | v40.13,97.54 39.24,96.65 33.4,96.65 32.79,97.26 LED16.A | LED18.C 29.19,65.02
N$32
  Top 0.254: 10.54,37.59 arc-190 11.56,38.23 arc-190 12.57,37.59 11.56,36.45 10.54,37.59
N$33
  Top 0.254: 13.33,37.59 arc-190 14.35,38.23 arc-190 15.37,37.59 14.35,36.45 13.33,37.59
N$34
  Top 0.254: 16.13,37.59 arc-190 17.14,38.23 arc-190 18.16,37.59 17.14,36.45 16.13,37.59
N$35
  Top 0.254: 18.92,37.59 arc-190 19.94,38.23 arc-190 20.95,37.59 19.94,36.45 18.92,37.59
N$36  (via drill 0.51)
  Top 0.254: v25.91,63.5 26.8,64.39 33.4,64.39 v34.29,63.5 41.91,71.12 41.91,74.42 47.12,79.63 47.12,82.55 48.39,83.82 51.31,83.82 52.58,85.09 52.58,86.11 55.75,89.28 v68.2,89.28
  Bottom 0.254: LED17.C 17.04,78.84 25.91,69.98 v25.91,63.5 | R52.2 v34.29,63.5 33.66,62.87 LED18.A | LED13.A 84.86,89.81 84.33,89.28 v68.2,89.28 62.74,89.28 62.21,89.81 LED14.C
N$37
  Top 0.254: 11.56,46.23 11.56,44.07 arc70 11.05,44.58 arc-70 10.79,45.34 | 11.56,46.23 11.56,46.35 | 11.81,46.35 arc-160 12.06,46.61 | 12.06,46.61 arc-160 11.81,46.35 | 12.06,46.61 arc160 11.94,46.48 arc160 12.06,46.61 | 11.56,46.23 arc-160 12.32,46.74 arc-160 11.56,46.23 | 11.68,46.23 arc-160 12.19,46.74 arc-160 11.68,46.23 | 11.56,46.48 11.56,46.35 | 11.56,46.35 11.68,46.23 | 11.68,46.23 11.56,46.23 | 11.68,46.23 11.81,46.35
N$38  (via drill 0.51)
  Top 0.254: 51.31,90.42 46.48,90.42 42.67,86.61 42.04,86.61 40.77,87.88 40.77,96.14 v42.16,97.54 | 51.31,90.42 60.83,90.42 62.74,92.33 65.91,92.33 v67.44,90.81 | v51.31,85.72 51.31,90.42
  Bottom 0.254: v51.31,85.72 R54.2 50.56,84.47 50.29,84.2 50.29,79.5 49.63,78.84 LED15.A | v42.16,97.54 40.77,96.14 30.1,96.14 29.19,97.05 LED16.C | LED14.A v67.44,90.81 LED13.C
N$39
  Bottom 0.254: X2.VBUS 38.28,91.49 37.34,90.55 F2.1
N$40
  Bottom 0.254: LED12.C 39.13,88.8 R39.2
N$41
  Bottom 0.254: LED22.A R57.1
  pour Top: 49.56,60.06 49.56,60.12 49.87,60.44 50.19,60.12 50.19,60.06
N$42
  Top 0.254: 9.78,45.72 9.78,43.56 | 9.78,43.56 9.78,43.31 9.4,43.31 | 9.78,43.56 arc-160 9.02,43.05 arc-160 9.78,43.56 | 9.27,43.18 arc160 9.52,43.43 arc160 9.27,43.18 | 9.4,43.31 arc-160 9.27,43.18 | 9.27,43.18 arc-160 9.4,43.31 | 9.65,43.56 arc-160 9.14,43.05 arc-160 9.65,43.56 | 9.78,43.56 9.65,43.56 | 9.65,43.56 9.4,43.31
N$43
  Top 0.254: 16.13,44.32 16.13,46.48 18.67,47.37 18.67,45.09 | 16.13,44.32 16.13,44.07 16,44.07 15.88,44.2 | 18.67,45.09 18.67,44.83 18.29,44.83 | 16,44.32 arc-160 15.49,43.81 | 15.49,43.81 arc-160 16,44.32 | 15.62,43.94 arc160 15.75,44.07 arc160 15.62,43.94 | 15.88,44.2 arc-160 15.62,43.94 | 15.62,43.94 arc-160 15.88,44.2 | 18.54,45.09 arc-160 18.03,44.58 arc-160 18.54,45.09 | 18.16,44.7 arc160 18.41,44.96 arc160 18.16,44.7 | 18.29,44.83 arc-160 18.16,44.7 | 18.16,44.7 arc-160 18.29,44.83 | 16.13,44.32 arc-160 15.37,43.81 arc-160 16.13,44.32 | 18.67,45.09 arc-160 17.91,44.58 arc-160 18.67,45.09 | 15.49,43.81 15.88,44.2 | 16.13,44.32 16,44.32 | 16,44.32 15.88,44.2 | 18.29,44.83 18.16,44.7 | 18.67,45.09 18.54,45.09 | 18.54,45.09 18.29,44.83
N$44
  Bottom 0.254: LED21.A R58.1
  pour Top: 50.96,59.98 50.96,60.48 51.45,60.48 51.6,60.33 51.6,59.99 51.45,59.84 50.96,59.84 50.96,59.98 50.96,59.98
N$45  (via drill 0.51)
  other vias: 70.99,67.69
N$46  (via drill 0.51)
  other vias: 73.53,66.42
N$47  (via drill 0.51)
  other vias: 76.07,66.42
N$48  (via drill 0.51)
  other vias: 78.61,66.42
N$49  (via drill 0.51)
  other vias: 79.88,66.42
N$50  (via drill 0.51)
  other vias: 82.42,66.42
N$51  (via drill 0.51)
  other vias: 84.96,66.42
N$52
  Top 0.254: 23.75,95.38 arc-160 22.99,94.87 arc-160 23.75,95.38
N$53
  Top 0.254: 11.56,98.3 11.56,96.14 arc70 11.05,96.65 arc-70 10.79,97.41 | 11.56,98.3 11.56,98.42 | 11.81,98.42 arc-160 12.06,98.68 | 12.06,98.68 arc-160 11.81,98.42 | 12.06,98.68 arc160 11.94,98.55 arc160 12.06,98.68 | 11.56,98.3 arc-160 12.32,98.81 arc-160 11.56,98.3 | 11.68,98.3 arc-160 12.19,98.81 arc-160 11.68,98.3 | 11.56,98.55 11.56,98.42 | 11.56,98.42 11.68,98.3 | 11.68,98.3 11.56,98.3 | 11.68,98.3 11.81,98.42
N$54
  Top 0.254: 13.59,43.56 13.59,45.72 arc70 14.1,45.21 arc-70 14.35,44.45 | 13.59,43.56 13.59,43.31 13.21,43.31 | 13.46,43.56 arc-160 12.95,43.05 arc-160 13.46,43.56 | 13.08,43.18 arc160 13.33,43.43 arc160 13.08,43.18 | 13.21,43.31 arc-160 13.08,43.18 | 13.08,43.18 arc-160 13.21,43.31 | 13.59,43.56 arc-160 12.83,43.05 arc-160 13.59,43.56 | 13.59,43.56 13.46,43.56 | 13.46,43.56 13.21,43.31
N$55
  Top 0.254: 16.13,96.39 16.13,98.55 18.67,99.44 18.67,97.16 | 16.13,96.39 16.13,96.14 16,96.14 15.88,96.27 | 18.67,97.16 18.67,96.9 18.29,96.9 | 16,96.39 arc-160 15.49,95.89 | 15.49,95.89 arc-160 16,96.39 | 15.62,96.01 arc160 15.75,96.14 arc160 15.62,96.01 | 15.88,96.27 arc-160 15.62,96.01 | 15.62,96.01 arc-160 15.88,96.27 | 18.54,97.16 arc-160 18.03,96.65 arc-160 18.54,97.16 | 18.16,96.77 arc160 18.41,97.03 arc160 18.16,96.77 | 18.29,96.9 arc-160 18.16,96.77 | 18.16,96.77 arc-160 18.29,96.9 | 16.13,96.39 arc-160 15.37,95.89 arc-160 16.13,96.39 | 18.67,97.16 arc-160 17.91,96.65 arc-160 18.67,97.16 | 15.49,95.89 15.88,96.27 | 16.13,96.39 16,96.39 | 16,96.39 15.88,96.27 | 18.29,96.9 18.16,96.77 | 18.67,97.16 18.54,97.16 | 18.54,97.16 18.29,96.9
N$56
  Top 0.254: 13.59,95.63 13.59,97.79 arc70 14.1,97.28 arc-70 14.35,96.52 | 13.59,95.63 13.59,95.38 13.21,95.38 | 13.46,95.63 arc-160 12.95,95.12 arc-160 13.46,95.63 | 13.08,95.25 arc160 13.33,95.5 arc160 13.08,95.25 | 13.21,95.38 arc-160 13.08,95.25 | 13.08,95.25 arc-160 13.21,95.38 | 13.59,95.63 arc-160 12.83,95.12 arc-160 13.59,95.63 | 13.59,95.63 13.46,95.63 | 13.46,95.63 13.21,95.38
N$57
  Top 0.254: 9.78,97.79 9.78,95.63 | 9.78,95.63 9.78,95.38 9.4,95.38 | 9.78,95.63 arc-160 9.02,95.12 arc-160 9.78,95.63 | 9.27,95.25 arc160 9.52,95.5 arc160 9.27,95.25 | 9.4,95.38 arc-160 9.27,95.25 | 9.27,95.25 arc-160 9.4,95.38 | 9.65,95.63 arc-160 9.14,95.12 arc-160 9.65,95.63 | 9.78,95.63 9.65,95.63 | 9.65,95.63 9.4,95.38
N$58
  Bottom 0.254: LED20.A 92.47,89.65 91.95,90.17 R55.1
N$59
  Bottom 0.254: LED19.A 7.61,89.65 8.75,90.79 R56.1
N$60
  Top 0.254: 21.21,99.31 21.21,97.16 | 21.21,97.16 arc-160 20.45,96.65 arc-160 21.21,97.16
N$61
  pour Top: 49.56,60.06 49.56,60.12 49.87,60.44 50.19,60.12 50.19,60.06
N$62
  pour Top: 50.96,59.98 50.96,60.48 51.45,60.48 51.6,60.33 51.6,59.99 51.45,59.84 50.96,59.84 50.96,59.98 50.96,59.98
N$63
  Top 0.254: 10.54,89.66 arc-190 11.56,90.3 arc-190 12.57,89.66 11.56,88.52 10.54,89.66
N$64
  Top 0.254: 13.33,89.66 arc-190 14.35,90.3 arc-190 15.37,89.66 14.35,88.52 13.33,89.66
N$65
  Top 0.254: 16.13,89.66 arc-190 17.14,90.3 arc-190 18.16,89.66 17.14,88.52 16.13,89.66
N$66
  Top 0.254: 18.92,89.66 arc-190 19.94,90.3 arc-190 20.95,89.66 19.94,88.52 18.92,89.66
PD1  (via drill 0.51)
  Top 0.254: 75.06,84.45 66.42,93.09 59.31,93.09 v58.93,92.71 | v89.93,88.15 89.18,88.9 79.5,88.9 75.06,84.45 | 75.06,84.45 v75.06,75.06
  Bottom 0.254: U2.22 68.39,68.39 v75.06,75.06 | LED20.C v89.93,88.15 | LED22.C 59.45,95.77 58.93,95.25 v58.93,92.71
PD5  (via drill 0.51)
  Top 0.254: 75.06,32.38 66.42,41.02 59.31,41.02 v58.93,40.64 | v89.93,36.08 89.18,36.83 79.5,36.83 75.06,32.38 | 75.06,32.38 v75.06,22.99
  Bottom 0.254: U1.22 68.39,16.32 v75.06,22.99 | LED9.C v89.93,36.08 | LED11.C 59.45,43.7 58.93,43.18 v58.93,40.64
PULL-UP  (via drill 0.51)
  Top 0.254: v75.31,47.24 35.56,47.24 33.03,44.72 27.45,44.72 24.15,41.42 v17.03,41.42 | v17.02,34.39 15.11,32.49 15.11,25.27 v18.8,21.59
  Bottom 0.254: R10.2 R11.2 R12.2 R13.2 R14.2 R15.2 86.22,40.02 81.79,44.45 | 81.79,44.45 78.99,47.24 v75.31,47.24 | v17.02,34.39 17.02,35.55 R8.2 R9.2 v17.03,41.42 | R7.2 R6.2 17.03,21.59 | R4.2 17.03,20.3 R5.2 17.03,21.59 | v18.8,21.59 17.03,21.59 | SJ1.2 77.98,40.64 81.79,44.45
PULL-UP1  (via drill 0.51)
  Top 0.254: v75.31,99.31 35.56,99.31 33.03,96.79 27.45,96.79 24.15,93.49 v17.03,93.49 | v17.02,86.46 15.11,84.56 15.11,77.34 v18.8,73.66
  Bottom 0.254: R44.2 R43.2 R42.2 R41.2 R40.2 R51.2 86.22,92.09 81.79,96.52 | 81.79,96.52 78.99,99.31 v75.31,99.31 | v17.02,86.46 17.02,87.61 R50.2 R49.2 v17.03,93.49 | R45.2 R46.2 17.03,73.66 | R48.2 17.03,72.38 R47.2 17.03,73.66 | v18.8,73.66 17.03,73.66 | SJ2.2 77.98,92.71 81.79,96.52
RESET  (via drill 0.51)
  Top 0.254: v54.61,34.54 57.02,32.13 57.02,22.48 v56.77,22.23
  Bottom 0.254: U1.13 58.06,23.52 v56.77,22.23 | v54.61,34.54 52.32,36.83 51.31,36.83 50.04,38.1 JP14.2 JP14.2-2 50.04,43.43 50.66,44.05 R3.1
RESET1  (via drill 0.51)
  Top 0.254: v54.61,86.61 57.02,84.2 57.02,74.55 v56.77,74.3
  Bottom 0.254: U2.13 58.06,75.59 v56.77,74.3 | v54.61,86.61 52.32,88.9 51.31,88.9 50.04,90.17 JP26.2 JP26.2-2 50.04,95.5 50.66,96.12 R30.1
VCC  (via drill 0.51)
  Top 0.254: v42.42,35.56 47.5,40.64 v53.85,40.64 | v88.79,40.02 87.49,40.02 86.87,40.64 81.79,40.64 v75.44,34.29 74.42,34.29 v68.71,40.01 62.99,45.72 v54.47,45.72
  Bottom 0.254: 55.12,19.05 55.12,20.32 | v53.85,23.24 55.92,25.31 U1.7 | U1.44 51.94,24.32 | 51.94,24.32 52.77,24.32 v53.85,23.24 | U1.2 51.92,24.34 51.94,24.32 | C7.A 46.1,15.11 46.85,15.86 C5.2 47.99,15.86 48.45,16.32 U1.34 51.12,16.32 53.85,19.05 55.12,19.05 | 55.12,20.32 56.13,20.32 58.53,22.72 U1.14 62.22,22.72 63.25,23.75 66.17,23.75 69.09,26.67 69.09,29.34 68.56,29.86 R28.2 67.82,31.75 70.36,34.29 v75.44,34.29 79.25,30.48 R29.2 | 55.12,19.05 56.77,19.05 57.78,18.03 57.78,16.13 58.32,15.6 | U1.24 58.32,15.6 | U1.7 55.92,26.71 | U1.7 55.92,27.47 56.39,27.94 56.39,35.56 55.12,36.83 JP14.4 55.12,40.64 | 34.8,32.38 37.34,32.38 | F1.2 37.34,32.38 | 37.34,32.38 39.24,32.38 v42.42,35.56 LED7.A | C8.2 34.8,32.38 | C6.2 61.47,15.11 60.96,15.62 58.32,15.62 58.32,15.6 | 55.12,20.32 55.12,21.97 v53.85,23.24 | 55.12,40.64 JP14.4-2 54.99,42.29 52.58,44.7 52.58,45.72 | 34.8,32.38 32.26,32.38 30.99,31.11 30.99,30.48 | 30.99,30.48 30.99,29.21 | 30.99,29.21 30.99,26.67 | R24.2 30.99,30.48 | R27.2 30.99,30.48 | R26.2 30.99,26.67 | 30.99,26.67 R25.2 | R18.2 10.67,40.64 13.21,43.18 17.02,43.18 20.83,39.37 20.83,36.83 28.45,29.21 30.99,29.21 | R17.2 v88.79,40.02 | v53.85,40.64 55.12,40.64 | R3.2 52.58,45.72 | 52.58,45.72 v54.47,45.72 R19.2 | R16.2 63.39,43.8 66.55,40.64 68.71,40.64 | v68.71,40.01 68.71,40.64 | 68.71,40.64 SJ1.1
VCC1  (via drill 0.51)
  Top 0.254: v42.42,87.63 47.5,92.71 v53.85,92.71 | v88.79,92.09 87.49,92.09 86.87,92.71 81.79,92.71 v75.44,86.36 74.42,86.36 v68.71,92.08 62.99,97.79 v54.47,97.79
  Bottom 0.254: 55.12,71.12 55.12,72.39 | v53.85,75.31 55.92,77.38 U2.7 | U2.44 51.94,76.39 | 51.94,76.39 52.77,76.39 v53.85,75.31 | U2.2 51.92,76.42 51.94,76.39 | C15.A 46.1,67.18 46.85,67.93 C14.2 47.99,67.93 48.45,68.39 U2.34 51.12,68.39 53.85,71.12 55.12,71.12 | 55.12,72.39 56.13,72.39 58.53,74.79 U2.14 62.22,74.79 63.25,75.82 66.17,75.82 69.09,78.74 69.09,81.41 68.56,81.93 R34.2 67.82,83.82 70.36,86.36 v75.44,86.36 79.25,82.55 R33.2 | 55.12,71.12 56.77,71.12 57.78,70.1 57.78,68.2 58.32,67.67 | U2.24 58.32,67.67 | U2.7 55.92,78.78 | U2.7 55.92,79.54 56.39,80.01 56.39,87.63 55.12,88.9 JP26.4 55.12,92.71 | 34.8,84.45 37.34,84.45 | F2.2 37.34,84.45 | 37.34,84.45 39.24,84.45 v42.42,87.63 LED12.A | C16.2 34.8,84.45 | C13.2 61.47,67.18 60.96,67.69 58.32,67.69 58.32,67.67 | 55.12,72.39 55.12,74.04 v53.85,75.31 | 55.12,92.71 JP26.4-2 54.99,94.36 52.58,96.77 52.58,97.79 | 34.8,84.45 32.26,84.45 30.99,83.19 30.99,82.55 | 30.99,82.55 30.99,81.28 | 30.99,81.28 30.99,78.74 | R38.2 30.99,82.55 | R35.2 30.99,82.55 | R36.2 30.99,78.74 | 30.99,78.74 R37.2 | R56.2 10.67,92.71 13.21,95.25 17.02,95.25 20.83,91.44 20.83,88.9 28.45,81.28 30.99,81.28 | R55.2 v88.79,92.09 | v53.85,92.71 55.12,92.71 | R30.2 52.58,97.79 | 52.58,97.79 v54.47,97.79 R58.2 | R57.2 63.39,95.87 66.55,92.71 68.71,92.71 | v68.71,92.08 68.71,92.71 | 68.71,92.71 SJ2.1

## Text on the board
Top: .com | .com
Bottom: a construction kit | The world is | a construction kit | The world is
Dimension: ROUTE OUT! | ROUTE OUT! | ROUTE OUT!
tPlace: MaKeyMaKey | SPACE | CLICK | EARTH | MaKeyMaKey | SPACE | CLICK | EARTH
bPlace: BE STOKED | Open Source | Hardware | PULL-UPS | D15 | RST | GND | 5V | D16 | D14 | POWER | SPACE | CLICK | A5 | D5 | A4 | D4 | ARROWS | A3 | D3 | A2 | D2 | A1 | D1 | A0 | D0 | Created by Jay Silver and Eric Rosenbaum | BE STOKED | Open Source | Hardware | PULL-UPS | D15 | RST | GND | 5V | D16 | D14 | POWER | SPACE | CLICK | A5 | D5 | A4 | D4 | ARROWS | A3 | D3 | A2 | D2 | A1 | D1 | A0 | D0 | Created by Jay Silver and Eric Rosenbaum
tStop: .com | .com
tRestrict: EARTH | EARTH
bRestrict: OUTPUT | OUTPUT